# EAGLE board schema (EAGLE 7.2.0)
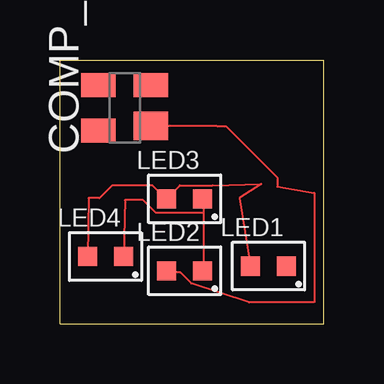
[diagram p0: board, top side]

Size 11 x 11 mm. Coordinates in mm from the lower left corner, seen from the top.
Outline: 0,0 11,0 11,11 0,11 0,0
Copper layers (1*16): Top 0.035mm / dielectric 0.75mm / Bottom 0.035mm
Design rules "default": minimum track width 3mil, minimum drill 5mil, track to track 3mil, track to pad 3mil, pad to pad 3mil, via to via 3mil, smd to smd 0mil, copper to edge 5mil, drill to drill 8mil, minimum pad ring 5mil, minimum via ring 2.5mil, stop-mask expansion 4mil, vias tented up to drill 0mil, thermal gap 10mil

## Footprints (pad centres in the part's own frame; a part is rotated, then mirrored left to right if it is on the bottom)
SOT143 = smd 1.2 x 1.44: 1 -0.75,-1.1 | smd 1 x 1.44: 2 0.95,-1.1; 3 0.95,1.1; 4 -0.95,1.1
LED = smd 0.8 x 0.8: ANODE -0.75,0; CATHODE 0.75,0

## Placement (x,y rotation side)
COMP_SOT143  [SOT143]  2.7,9 90 top
LED1  LTST-C191KRKT  [LED]  8.7,2.4 0 top
LED2  LTST-C191KRKT  [LED]  5.2,2.2 0 top
LED3  LTST-C191KRKT  [LED]  5.2,5.2 0 top
LED4  LTST-C191KRKT  [LED]  1.9,2.8 0 top

## Library data of the parts
COMP_SOT143 = semicon-smd-ipc
LED1-LED4 = Andres_Project

## Nets
N$0: LED1.ANODE LED3.ANODE LED4.ANODE
N$1: LED2.CATHODE LED3.CATHODE LED4.CATHODE
N$2: COMP_SOT143.1 LED2.ANODE

## Tracks (layer width: path | path; a pad name or v marks a point on that pad's centre or on a via)
N$0
  Top 0.076: LED4.ANODE 1.19,5.23 1.65,5.23 2.18,5.76 3.86,5.76 4.39,5.23 LED3.ANODE 4.47,5.23 5,5.76 6.37,5.76 8.41,5.83 7.49,5.23 LED1.ANODE
N$1
  Top 0.076: 5.99,4.62 5.99,5.15 LED3.CATHODE | 5.99,4.62 5.99,2.26 LED2.CATHODE | 5.99,4.62 4.01,4.62 3.48,5.15 2.71,5.15 LED4.CATHODE
N$2
  Top 0.076: LED2.ANODE 4.5,2.13 5.03,2.13 5.49,1.68 7.9,0.88 10.61,0.89 10.61,5.46 9.07,5.71 9.07,6.1 6.93,8.23 6.55,8.23 COMP_SOT143.1